# EAGLE board thermocouple-sensor (EAGLE 4.16)
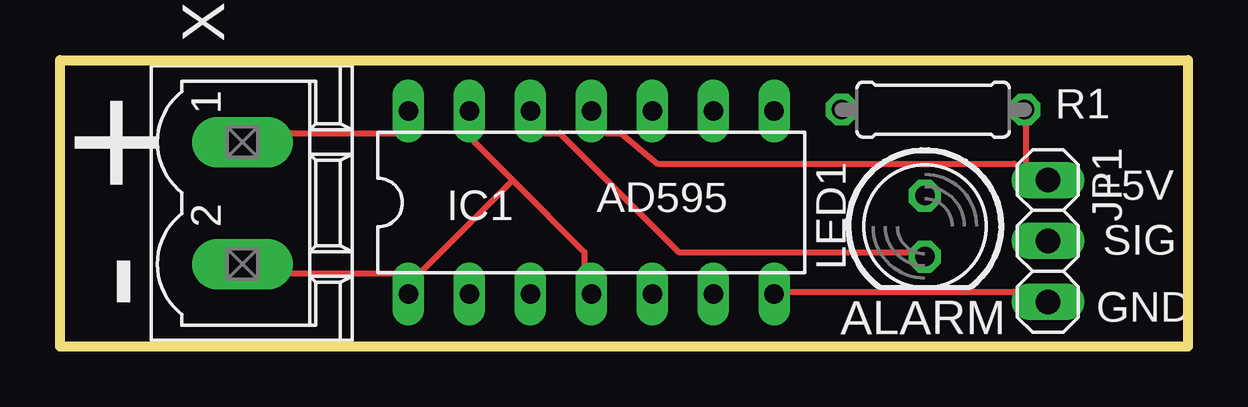
[diagram p0: board, top side]
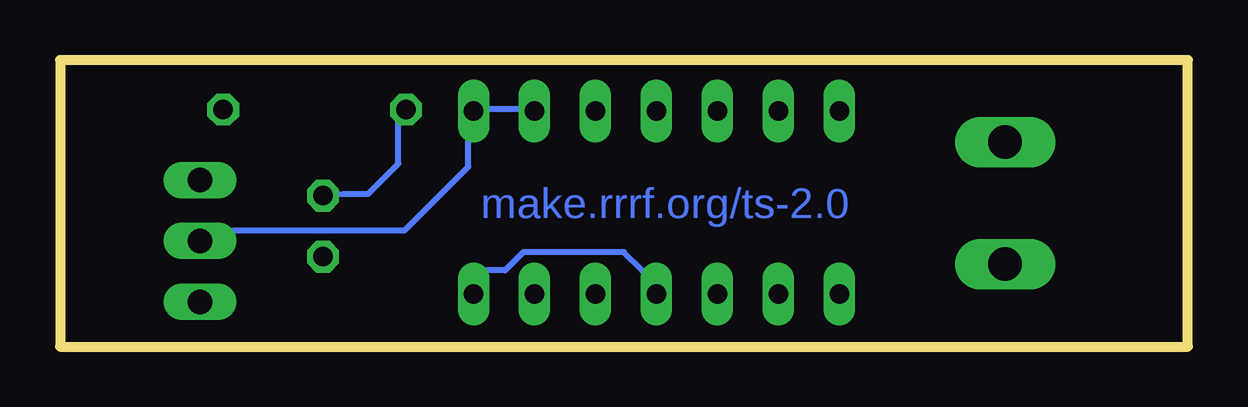
[diagram p1: board, bottom side, seen from below]

Size 46.99 x 11.94 mm. Coordinates in mm from the lower left corner, seen from the top.
Outline: 0,11.94 46.99,11.94 46.99,0 0,0 0,11.94
Copper layers (1*16): Top 0.035mm / dielectric 1.5mm / Bottom 0.035mm
Design rules "default": minimum track width 10mil, minimum drill 24mil, track to track 8mil, track to pad 8mil, pad to pad 8mil, via to via 8mil, smd to smd 8mil, copper to edge 40mil, drill to drill 8mil, minimum pad ring 10mil, minimum via ring 8mil, stop-mask expansion 4mil, vias tented up to drill 0mil, thermal gap 10mil

## Footprints (pad centres in the part's own frame; a part is rotated, then mirrored left to right if it is on the bottom)
DIL14 = drill 0.813 long: 1 -7.62,-3.81; 2 -5.08,-3.81; 3 -2.54,-3.81; 4 0,-3.81; 5 2.54,-3.81; 6 5.08,-3.81; 7 7.62,-3.81; 8 7.62,3.81; 9 5.08,3.81; 10 2.54,3.81; 11 0,3.81; 12 -2.54,3.81; 13 -5.08,3.81; 14 -7.62,3.81
1X03 = drill 1.016 long: 1 -2.54,0; 2 0,0; 3 2.54,0
LED5MM = drill 0.813 octagon: A -1.27,0; K 1.27,0
0207/7 = drill 0.813 octagon: 1 -3.81,0; 2 3.81,0
MSTBV2 = drill 1.397 long: 1 -2.54,0; 2 2.54,0

## Placement (x,y rotation side)
IC1  [DIL14]  22.14,6 0 top
JP1  [1X03]  41.16,4.4 270 top
LED1  [LED5MM]  36.03,5.01 270 top
R1  330  [0207/7]  36.38,9.87 0 top
X1  MST2V  [MSTBV2]  7.61,5.98 270 top

## Library data of the parts
IC1 = analog-devices
JP1 = pinhead
LED1 = led
R1 = rcl
X1 = con-phoenix-508

## Nets
GND: IC1.1 IC1.4 IC1.7 IC1.13 JP1.3 X1.2
N$1: LED1.A R1.1
N$2: IC1.12 LED1.K
N$3: IC1.14 X1.1
N$5: IC1.8 IC1.9 JP1.2
VCC: IC1.11 JP1.1 R1.2

## Tracks (layer width: path | path; a pad name or v marks a point on that pad's centre or on a via)
GND
  Top 0.254: IC1.7 30.35,2.29 39.75,2.29 JP1.3 | X1.2 9.65,3.05 13.97,3.05 IC1.1 15.11,3.18 18.86,6.92 | 18.86,6.92 17.27,8.51 IC1.13 | 18.86,6.92 21.84,3.94 21.84,3.43 IC1.4
  Bottom 0.254: IC1.7 29.21,3.18 28.45,3.18 27.69,3.94 23.49,3.94 22.73,3.18 IC1.4
N$1
  Bottom 0.254: LED1.A 35.18,6.35 34.16,6.35 32.89,7.62 32.89,9.78 R1.1
N$2
  Top 0.254: IC1.12 20.19,8.89 20.83,8.89 25.78,3.94 35.31,3.94 LED1.K
N$3
  Top 0.254: IC1.14 13.97,8.89 9.65,8.89 X1.1
N$5
  Bottom 0.254: IC1.9 27.81,9.91 29.21,9.91 IC1.8 29.97,8.51 29.97,7.49 32.64,4.83 39.75,4.83 JP1.2
VCC
  Top 0.254: IC1.11 22.73,8.89 23.37,8.89 24.89,7.62 39.75,7.62 JP1.1 40.26,7.62 40.26,9.78 R1.2

## Text on the board
Bottom: make.rrrf.org/ts-2.0
tPlace: + | AD595 | +5V | SIG | - | ALARM | GND